# EAGLE board BBS_Male (EAGLE 9.5.1)
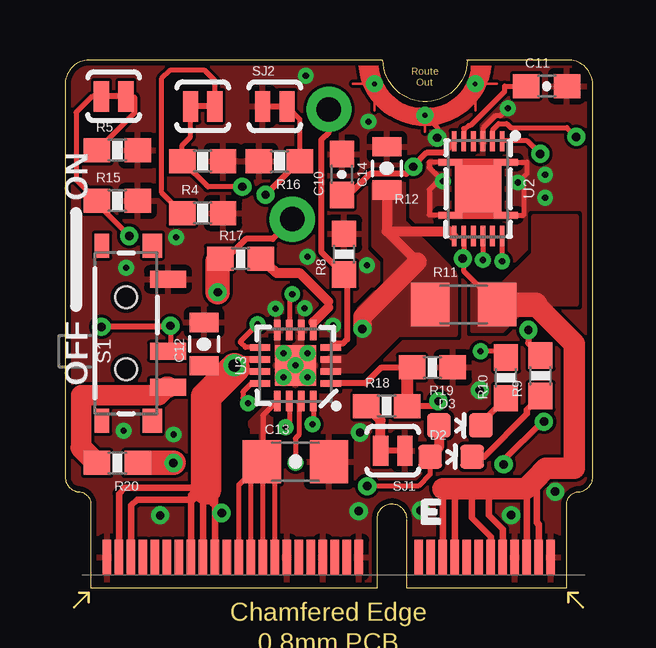
[diagram p0: board, top side]
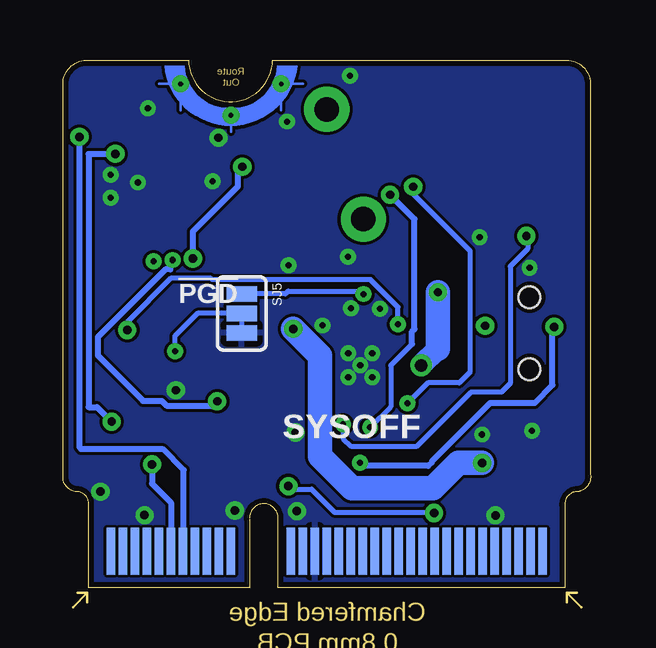
[diagram p1: board, bottom side, seen from below]

Size 22 x 22 mm. Coordinates in mm from the lower left corner, seen from the top.
Outline: 13.24,22 1,22 arc90 0.01,20.95
Outline: 0.01,21.08 0.01,4.72 arc76 0.41,4.04 arc-17 0.49,4.01 arc-104 1.07,3.4 1.07,0 13.04,0 13.04,2.97 arc-175 14.23,2.9
Outline: 14.23,2.87 14.23,0 20.93,0 20.93,3.58 arc-86 21.47,4.01
Outline: 21.49,4.01 arc45 21.93,4.32 arc29 22,4.55 22,21.08 arc81 21.04,22 16.77,22
Outline: 16.77,22 16.74,22
Outline: 16.77,22 arc-179 13.26,22
Copper layers (1*16): Top 0.075mm / dielectric 1.6mm / Bottom 0.075mm
Design rules "jlcpcb-rules-2layers-2OZ": minimum track width 8mil, minimum drill 0.2mm, track to track 5mil, track to pad 5mil, pad to pad 5mil, via to via 5mil, smd to smd 5mil, copper to edge 0.2mm, drill to drill 6mil, minimum pad ring 10mil, minimum via ring 8mil, stop-mask expansion 3mil, vias tented up to drill 0mil, thermal gap 10mil

## Footprints (pad centres in the part's own frame; a part is rotated, then mirrored left to right if it is on the bottom)
0603-CAP = smd 1.1 x 1: 1 -0.85,0; 2 0.85,0
0805-CAP = smd 0.8 x 1.2: 1 -0.9,0; 2 0.9,0
1206-CAP = smd 1.6 x 1.8: 1 -1.4,0; 2 1.4,0
LED-0603 = smd 1 x 1: A 0,-0.877; C 0,0.877
M.2-CARD-E-22 = smd 0.35 x 1.45: 1 9.25,1.275; 3 8.75,1.275; 5 8.25,1.275; 7 7.75,1.275; 9 7.25,1.275; 11 6.75,1.275; 13 6.25,1.275; 15 5.75,1.275; 17 5.25,1.275; 19 4.75,1.275; 21 4.25,1.275; 23 3.75,1.275; 33 1.25,1.275; 35 0.75,1.275; 37 0.25,1.275; 39 -0.25,1.275; 41 -0.75,1.275; 43 -1.25,1.275; 45 -1.75,1.275; 47 -2.25,1.275; 49 -2.75,1.275; 51 -3.25,1.275; 53 -3.75,1.275; 55 -4.25,1.275; 57 -4.75,1.275; 59 -5.25,1.275; 61 -5.75,1.275; 63 -6.25,1.275; 65 -6.75,1.275; 67 -7.25,1.275; 69 -7.75,1.275; 71 -8.25,1.275; 73 -8.75,1.275; 75 -9.25,1.275 | smd 0.35 x 1.95 bottom: 2 9,1.525; 4 8.5,1.525; 6 8,1.525; 8 7.5,1.525; 10 7,1.525; 12 6.5,1.525; 14 6,1.525; 16 5.5,1.525; 18 5,1.525; 20 4.5,1.525; 22 4,1.525; 32 1.5,1.525; 34 1,1.525; 36 0.5,1.525; 38 0,1.525; 40 -0.5,1.525; 42 -1,1.525; 44 -1.5,1.525; 46 -2,1.525; 48 -2.5,1.525; 50 -3,1.525; 52 -3.5,1.525; 54 -4,1.525; 56 -4.5,1.525; 58 -5,1.525; 60 -5.5,1.525; 62 -6,1.525; 64 -6.5,1.525; 66 -7,1.525; 68 -7.5,1.525; 70 -8,1.525; 72 -8.5,1.525; 74 -9,1.525 | drill 0.2: GND1 1.9,21; GND2 4,19.7; GND3 6.1,21
1X01_NO_SILK = drill 1.016 pad 1.88: 1 0,0
0603-RES = smd 1.1 x 1: 1 -0.85,0; 2 0.85,0
1206 = smd 1.6 x 1.8: 1 -1.4,0; 2 1.4,0
SWITCH-SPST-SMD-A = smd 0.7 x 1.5: 1 -2.25,-1.75; 2 -0.75,-1.75; 3 2.25,-1.75 | smd 1 x 0.6: GND1 -3.65,1; GND3 3.65,1 | smd 1 x 0.8: GND2 -3.65,-1.1; GND4 3.65,-1.1 | hole 0.9: -1.5,0; 1.5,0
PAD-JUMPER-2-NC_BY_TRACE_YES_SILK = smd 0.635 x 1.27: 1 -0.508,0; 2 0.508,0
PAD-JUMPER-3-2OF3_NC_BY_TRACE_YES_SILK_FULL_BOX = smd 0.635 x 1.27: 1 -0.813,0; 2 0,0; 3 0.813,0
PDSO-N12 = smd 0.2 x 0.85: 1 -1,-1.975; 2 -0.6,-1.975; 3 -0.2,-1.975; 4 0.2,-1.975; 5 0.6,-1.975; 6 1,-1.975; 7 1,1.975; 8 0.6,1.975; 9 0.2,1.975; 10 -0.2,1.975; 11 -0.6,1.975; 12 -1,1.975 | smd 1.95 x 1.95: EP 0,0 | smd 1 x 0.25: EP1 -1.15,1.1; EP2 -1.15,-1.1; EP3 1.15,-1.1; EP4 1.15,1.1
PVQFN-N16 = smd 0.28 x 0.85: 1 -0.75,-1.475; 2 -0.25,-1.475; 3 0.25,-1.475; 4 0.75,-1.475; 9 0.75,1.475; 10 0.25,1.475; 11 -0.25,1.475; 12 -0.75,1.475 | smd 0.85 x 0.28: 5 1.475,-0.75; 6 1.475,-0.25; 7 1.475,0.25; 8 1.475,0.75; 13 -1.475,0.75; 14 -1.475,0.25; 15 -1.475,-0.25; 16 -1.475,-0.75 | smd 1.7 x 1.7: EP 0,0

## Placement (x,y rotation side)
C10  1.0uF  [0603-CAP]  11.54,17.23 90 top
C11  0.47uF  [0603-CAP]  20.08,20.9 0 top
C12  10uF  [0805-CAP]  5.8,10.16 90 top
C13  1.0uF  [1206-CAP]  9.61,5.26 0 top
C14  10uF  [0805-CAP]  13.42,17.48 90 top
D2  BLUE  [LED-0603]  16.1,5.47 270 top
D3  RED  [LED-0603]  16.47,6.77 270 top
J1  MICROMOD-2222  [M.2-CARD-E-22]  11,0 0 top
JP2  [1X01_NO_SILK]  9.48,15.37 180 top
JP3  [1X01_NO_SILK]  11,19.94 270 top
R4  1.1k  [0603-RES]  5.74,15.62 0 top
R5  590  [0603-RES]  2.19,18.23 0 top
R8  100k  [0603-RES]  11.64,13.91 90 top
R9  180  [0603-RES]  19.83,8.84 90 top
R10  1K  [0603-RES]  18.39,8.75 90 top
R11  0.01  [1206]  16.62,11.81 0 top
R12  1.1k  [0603-RES]  5.74,17.78 0 top
R15  590  [0603-RES]  2.19,16.13 0 top
R16  45k  [0603-RES]  8.94,17.78 180 top
R17  10K  [0603-RES]  7.32,13.72 0 top
R18  10K  [0603-RES]  13.42,7.58 0 top
R19  10K  [0603-RES]  15.32,9.19 180 top
R20  100k  [0603-RES]  2.19,5.21 180 top
S1  [SWITCH-SPST-SMD-A]  2.55,10.61 90 top
SJ1  [PAD-JUMPER-2-NC_BY_TRACE_YES_SILK]  13.67,5.71 180 top
SJ2  [PAD-JUMPER-2-NC_BY_TRACE_YES_SILK]  8.75,20.07 0 top
SJ3  [PAD-JUMPER-2-NC_BY_TRACE_YES_SILK]  2.03,20.48 180 top
SJ4  [PAD-JUMPER-2-NC_BY_TRACE_YES_SILK]  5.74,20.07 180 top
SJ5  [PAD-JUMPER-3-2OF3_NC_BY_TRACE_YES_SILK_FULL_BOX]  14.55,11.44 270 bottom
U2  BQ27441-G1  [PDSO-N12]  17.23,16.64 180 top
U3  BQ24075  [PVQFN-N16]  9.61,9.27 90 top

## Library data of the parts
C10 = SparkFun-Capacitors; PROD_ID: CAP-00868
C11 = SparkFun-Capacitors; PROD_ID: CAP-13216
C12 C14 = SparkFun-Capacitors; PROD_ID: CAP-11330
C13 = SparkFun-Capacitors; PROD_ID: CAP-09822
D2 = SparkFun-LED; PROD_ID: DIO-08575
D3 = SparkFun-LED; PROD_ID: DIO-00819
J1 = SparkFun-MicroMod
JP2 JP3 = SparkFun-Connectors
R4 R12 R16 = SparkFun-Passives; PROD_ID: RES-10447
R5 R15 = SparkFun-Passives; PROD_ID: RES-13217
R8 R20 = SparkFun-Resistors; PROD_ID: RES-07828
R9 = SparkFun-Resistors; PROD_ID: RES-08788
R10 = SparkFun-Resistors; PROD_ID: RES-07856
R11 = SparkFun-Resistors; PROD_ID: RES-13218
R17-R19 = SparkFun-Resistors; PROD_ID: RES-00824
S1 = SparkFun-Electromechanical; PROD_ID: SWCH-10651
SJ1-SJ5 = SparkFun-Passives
U2 = battery-management-temp; PROD_ID: IC-13220
U3 = battery-management-temp; PROD_ID: IC-13219

## Nets
1.8V: C11.1 U2.5
5.5V: C12.1 D2.A D3.A J1.57 J1.59 J1.61 J1.71 J1.73 JP2.1 R17.1 U3.10 U3.11
5V: C13.1 J1.47 J1.49 J1.51 J1.53 U3.13
!CE!: JP3.1 R8.1 U3.4
!CHG!: R9.2 U3.9
!PGOOD!: SJ5.1 U3.7
BATTERY_IN: C10.1 J1.3 J1.5 J1.9 J1.11 J1.17 J1.19 R11.2 U2.6 U2.8
EN2: R17.2 U3.5
GND: C10.2 C11.2 C12.2 C13.2 C14.2 J1.1 J1.7 J1.33 J1.36 J1.39 J1.45 J1.75 J1.GND1 J1.GND2 J1.GND3 R4.2 R5.2 R8.2 R12.2 R15.2 R16.2 R19.1 S1.3 SJ1.1 SJ2.1 SJ5.3 U2.3 U2.EP U2.EP1 U2.EP2 U2.EP3 U2.EP4 U3.6 U3.8 U3.EP
GPOUT: U2.12
ILIM: R12.1 SJ4.2 U3.12
ISET: R15.1 SJ3.2 U3.16
N$3: R18.1 SJ1.2
N$4: R20.2 S1.1
N$5: R4.1 SJ4.1
N$7: R5.1 SJ3.1
N$10: R10.2 SJ5.2
N$11: D2.C R9.1
N$12: D3.C R10.1
SCL: J1.14 U2.2
SDA: J1.12 U2.1
SYSOFF: S1.2 U3.15
TMR: R16.1 SJ2.2 U3.14
TS: R18.2 R19.2 U2.10 U3.1
V_BATT: C14.1 R11.1 R20.1 U2.7 U3.2 U3.3

## Tracks (layer width: path | path; a pad name or v marks a point on that pad's centre or on a via)
1.8V
  Top 0.203: C11.1 18.34,20.9 18.34,20.7 16.9,19.27 16.83,19.27 16.7,19.14 16.63,19.14 U2.5
5.5V  (via drill 0.35, 0.51)
  Top 0.203: D2.A 15.22,4.73 14.74,4.24 v12.6,4.24
  Top 0.254: JP2.1 8.66,14.55 7.55,14.55 6.62,13.61 6.37,13.61
  Top 0.279: 5.82,4.17 5.54,4.17 | 5.54,4.17 2.49,4.17 2.25,3.93 J1.73 | J1.71 2.75,3.43 3,3.68 5.33,3.68 5.75,4.1 | J1.61 5.25,3.88 5.54,4.17 | J1.59 5.75,4.1 | 5.75,4.1 5.82,4.17 | J1.57 6.25,3.73 5.92,4.06 | 5.92,4.06 5.89,4.1 5.82,4.17 | v6.53,3.12 5.92,3.73 5.92,4.06 | U3.11 7.32,9.02 v7.07,9.27 | U3.10 7.32,9.52 v7.07,9.27 | C12.1 v7.06,9.26 v7.07,9.27
  Top 0.406: D3.A 15.59,5.83 D2.A
  Top 0.889: 7.07,9.15 v7.07,9.27
  Top 1.016: R17.1 6.37,13.61 v6.37,12.32
  Top 1.27: 5.89,4.1 5.89,7.97 7.07,9.15
  Bottom 0.203: v6.53,3.12 6.56,3.15 10.67,3.15 11.64,4.12 12.48,4.12 v12.6,4.24
  Bottom 0.889: 6.37,9.97 v7.07,9.27
  Bottom 1.016: v6.37,12.32 6.37,9.97
5V
  Top 0.203: J1.49 8.25,5.21 | J1.51 7.75,4.8 C13.1 | J1.53 7.25,4.3 C13.1 | J1.47 8.75,4.71 8.25,5.21 | 8.25,5.21 C13.1 | U3.13 8.25,7.19 8.25,5.21
  pour Top: 8.43,7.59 8.58,7.59 8.58,5.66 7.83,5.66 7.83,6.68 7.73,6.78 7.73,6.89
!CE!
  Top 0.254: U3.4 11.24,10.18 11.59,10.18 11.76,10.35 11.76,12.93 R8.1 10.68,14.01 10.68,18.67 11,18.99 JP3.1
!CHG!  (via drill 0.25, 0.35)
  Top 0.203: U3.9 7.52,10.02 7.32,10.22 7.32,10.27 v8.03,10.99
  Top 0.254: v19.32,10.74 v19.31,10.74 19.31,10.2 R9.2
  Bottom 0.203: v8.03,10.99 8.03,11.7 9.18,12.84 15.78,12.84 15.85,12.91 17.49,12.91 19.32,11.08 v19.32,10.74
!PGOOD!  (via drill 0.25)
  Top 0.203: v9.48,12.24 9.36,12.12 U3.7
  Bottom 0.203: SJ5.1 12.72,12.25 12.61,12.36 9.59,12.36 v9.48,12.24
BATTERY_IN  (via drill 0.35)
  Top 0.203: U2.8 16.63,13.69 16.63,13.2 R11.2 | J1.11 17.75,1.5
  Top 0.254: U2.6 16.23,18.55 15.8,18.12 15.07,18.12 14.52,17.57 v14.52,17.55 14.23,17.25 12.72,17.25 11.85,16.38 C10.1 | 16.63,13.69 v16.59,13.73
  Top 0.279: J1.3 19.75,2.65 19.68,2.71 19.68,4.38 19.56,4.5 | J1.19 | J1.19 15.75,4.14 | J1.17 16.25,4.13 16.26,4.14 | J1.5 19.25,4.09 19.21,4.14 | J1.9 18.25,2.45 17.68,3.02 17.68,4.14 | 17.75,1.5 17.75,2.14 16.97,2.92 16.97,4.14
  Top 0.889: 19.61,11.81 21.24,10.17 21.24,4.99 20.06,4.99 19.56,4.5 19.21,4.14 17.68,4.14 16.97,4.14 16.26,4.14 15.75,4.14
  Top 1.016: R11.2 19.61,11.81
  Bottom 0.254: v14.52,17.55 14.72,17.55 14.72,16.73 16.59,14.85 v16.59,13.73
  pour Top (isolate 0.203, no thermals): 21.32,11.81 19.33,11.81 18.22,10.71 17,10.71 17,12.67 18.28,12.67 19.55,13.93 19.55,15.49 21.32,15.49
EN2
  Top 0.203: U3.5 10.36,11.07 | 10.98,11.69 10.98,11.93
  Top 0.406: R17.2 8.83,13.12 9.8,13.1 10.98,11.93 | 10.36,11.07 10.98,11.69
GND  (via drill 0.25, 0.35)
  Top 0.203: U2.EP1 19.13,15.54 19.13,16.64 v18.88,16.89 19.26,17.27 19.26,17.74 U2.EP2 | U2.EP4 15.19,15.54 15.19,16.59 15.65,17.05 v15.76,16.95 15.19,17.51 15.19,17.74 U2.EP3 | v18.46,19.99 18.15,19.67 17.95,19.67 17.43,19.14 U2.3 | J1.GND2 15.52,19.18 v15.52,18.76
  other vias: 12.65,19.43 10.11,13.79 9.61,9.27 9.11,8.77 9.11,9.77 10.11,9.77 10.11,8.77 8.78,11.63 20.02,16.26 4.63,14.6 20.02,17.21 12.6,13.44 4.53,6.39 2.54,13.33 2.44,6.55 10.04,21.34 10,11.65 11.17,10.94 12.25,3.2 12.3,6.48 3.97,3.02 20.44,4.01 14.84,3.23 18.6,3.03 17.3,8.24
  pour Top (rank 2): -0.07,22.05 22.31,22.05 22.31,-0.15 -0.07,-0.15
  pour Bottom (rank 2): -0.02,22.07 22.18,22.07 22.18,-0.03 -0.02,-0.03
GPOUT  (via drill 0.25)
  Top 0.203: U2.12 v18.23,13.6
ILIM  (via drill 0.25, 0.35)
  Top 0.203: SJ4.2 5.23,18.8 4.89,18.45 R12.1 5.96,16.71 v7.4,16.71 | U3.12 7.76,8.51 7.42,8.17 7.42,7.91 v7.64,7.7
  Bottom 0.203: v7.64,7.7 6.79,8.55 5.48,8.55 5.02,9.01 5.02,14.03 7.4,16.41 v7.4,16.71
ISET  (via drill 0.25, 0.35)
  Top 0.203: v10.32,6.82 10.36,6.86 U3.16 | v2.68,14.66 1.34,16.01 R15.1 0.46,17 0.46,19.81 1.13,20.48 SJ3.2
  Bottom 0.203: v2.68,14.66 2.57,14.56 2.62,14.51 2.62,14.12 3.35,13.4 3.35,8.52 3.71,8.15 4.99,8.15 7.24,5.91 10,5.91 10.32,6.22 v10.32,6.82
N$3
  Top 0.406: SJ1.2 13.16,6.98 R18.1
N$4
  Top 0.864: 4.24,8.36 3.9,8.03 0.68,8.03 0.68,5.84
  Top 0.889: 4.24,8.36 S1.1 | R20.2 1.31,5.21 0.68,5.84
N$5
  Top 0.203: R4.1 4.02,16.49 4.02,21.21 4.37,21.56 5.82,21.56 6.25,21.14 SJ4.1
N$7
  Top 0.203: R5.1 2.9,19.79 2.9,20.45 2.58,20.45 SJ3.1
N$10  (via drill 0.25)
  Top 0.203: R10.2 18.12,9.87 v17.33,9.87
  Bottom 0.203: v17.33,9.87 17.33,10.5 16.39,11.44 SJ5.2
N$11
  Top 0.279: R9.1 19.26,7.43 19.26,7.25 17.48,5.47 D2.C
N$12
  Top 0.279: D3.C 17.34,6.85 R10.1
SCL  (via drill 0.35)
  Top 0.203: U2.2 17.82,19.07 18.09,19.34 18.42,19.34 18.59,19.18 20.93,19.18 v21.32,18.8
  Bottom 0.254: v21.32,18.8 v21.32,18.79 21.32,5.87 21.24,5.8 17.85,5.8 16.96,4.91 16.96,1.56 J1.14
SDA  (via drill 0.35)
  Top 0.203: v19.82,18.09 19.28,18.63 18.24,18.63 U2.1 | v19.97,6.93 19.91,6.93 | 18.29,5.31 v18.29,5.15
  Top 0.254: 19.91,6.93 18.29,5.31
  Bottom 0.254: v19.82,18.09 20.94,18.09 20.94,7.53 20.58,7.53 v19.97,6.93 | J1.12 17.5,3.55 18.29,4.34 v18.29,5.15
SYSOFF  (via drill 0.25, 0.35)
  Top 0.203: U3.15 9.75,7.69 9.75,6.38 9.6,6.23 9.6,5.23 v9.62,5.22 | v4.4,10.92 4.4,9.97 S1.2
  Top 0.254: v4.4,10.92 4.35,10.88 v1.52,10.88
  Bottom 0.203: 9.49,5.09 v9.62,5.22
  Bottom 0.254: v1.52,10.88 1.59,10.81 1.59,8.46 2.33,7.71 4.18,7.71 6.6,5.29 6.6,5.26 6.77,5.09 9.49,5.09
TMR  (via drill 0.25, 0.35)
  Top 0.203: U3.14 9.36,6.86 v9.19,6.7 | 9.79,17.65 R16.1 9.79,19.53 SJ2.2
  Top 0.254: 9.79,17.65 9.63,17.65 v8.36,16.38
  Bottom 0.203: v9.19,6.7 8.34,7.55 8.34,9.27 7.45,10.16
  Bottom 0.254: 7.45,10.16 7.45,10.68 7.35,10.79 7.35,15.37 v8.36,16.38
TS  (via drill 0.25, 0.35)
  Top 0.203: U2.10 v17.43,13.66
  Top 0.254: R19.2 13.2,9.19 12.54,8.52 U3.1 | v15.57,7.78 15.37,7.58 R18.2
  Top 0.508: R19.2 14.27,8.98 R18.2
  Bottom 0.203: v17.43,13.66 17.53,13.56
  Bottom 0.254: 17.53,13.56 17.53,13.27 17.73,13.27 20.55,10.45 20.55,9.69 18.66,7.8 17.89,7.8 17.68,7.6 15.75,7.6 v15.57,7.78
V_BATT  (via drill 0.35)
  Top 0.203: U2.7 16.19,14.66
  Top 0.406: C14.1 13.42,14.85 | 14.69,13.59 13.42,14.85 | 13.42,14.85 13.41,14.86 15.99,14.86 16.19,14.66
  Top 0.762: v12.4,10.79 12.4,11.3 14.69,13.59
  Top 1.016: R20.1 v4.53,5.21
  Bottom 1.016: v4.53,5.21 5.52,5.21 6.57,4.16 9.96,4.16 11.28,5.48 11.28,9.68 v12.4,10.79
  pour Top (isolate 0.203, no thermals): 16.27,10.54 13.39,10.54 13.39,13.75 12.88,14.26 12.88,16.89 14.12,16.89 14.12,15.25 16.27,13.1
  pour Top (no thermals): 14.69,12.32 12.9,12.32 12.23,11.65 12.23,10.12 11.77,9.65 11,9.65 10.75,9.4 10.75,9.02 12.41,9.02 14.69,11.29

## Text on the board
tPlace: ON | OFF
bPlace: !PGD! | SYSOFF
tDocu: - 2oz Copper!